# Altium PCB PDC_A.PcbDoc (part 1 of 2)
Units mm, origin at the board's own origin, x right, y up, seen from the top; angles counter-clockwise.
Board outline 139 x 130.14 mm, 2 copper layers (Top Layer, Bottom Layer); 172 components, 174 nets, 834 pads, 5 vias.
Unrouted connection lines stored in the file: 453.
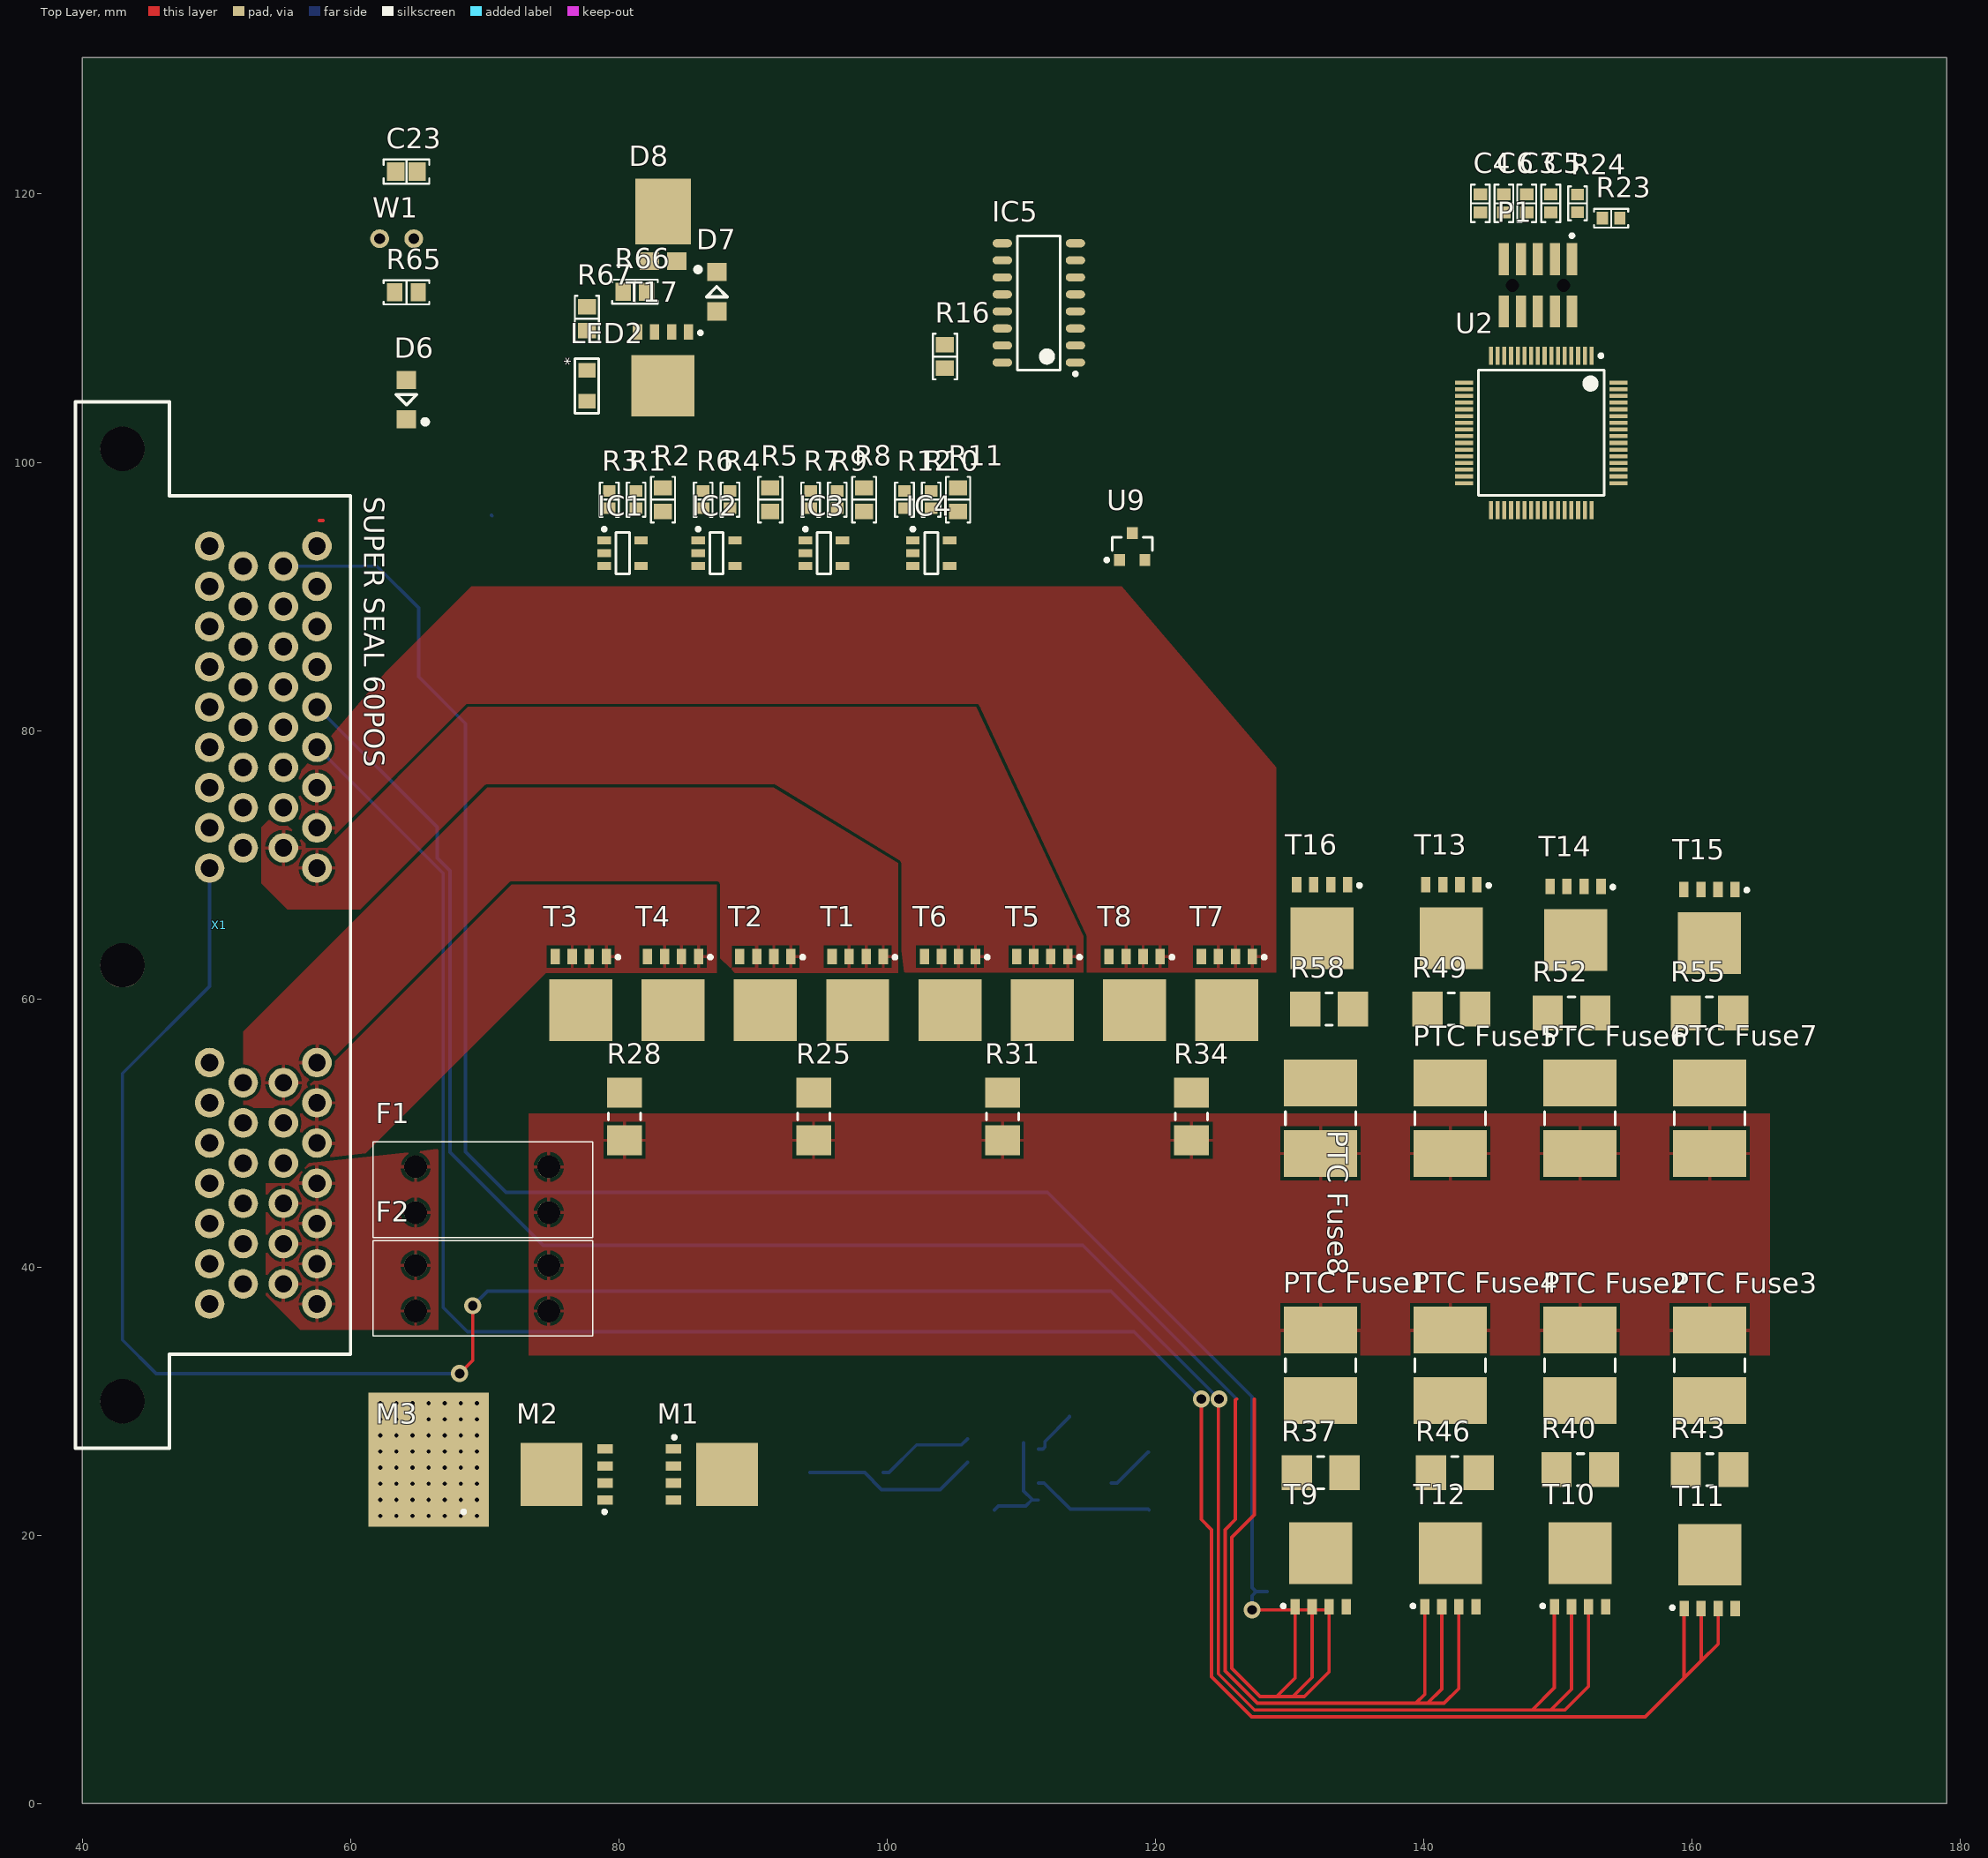
[diagram p0: Top Layer view]
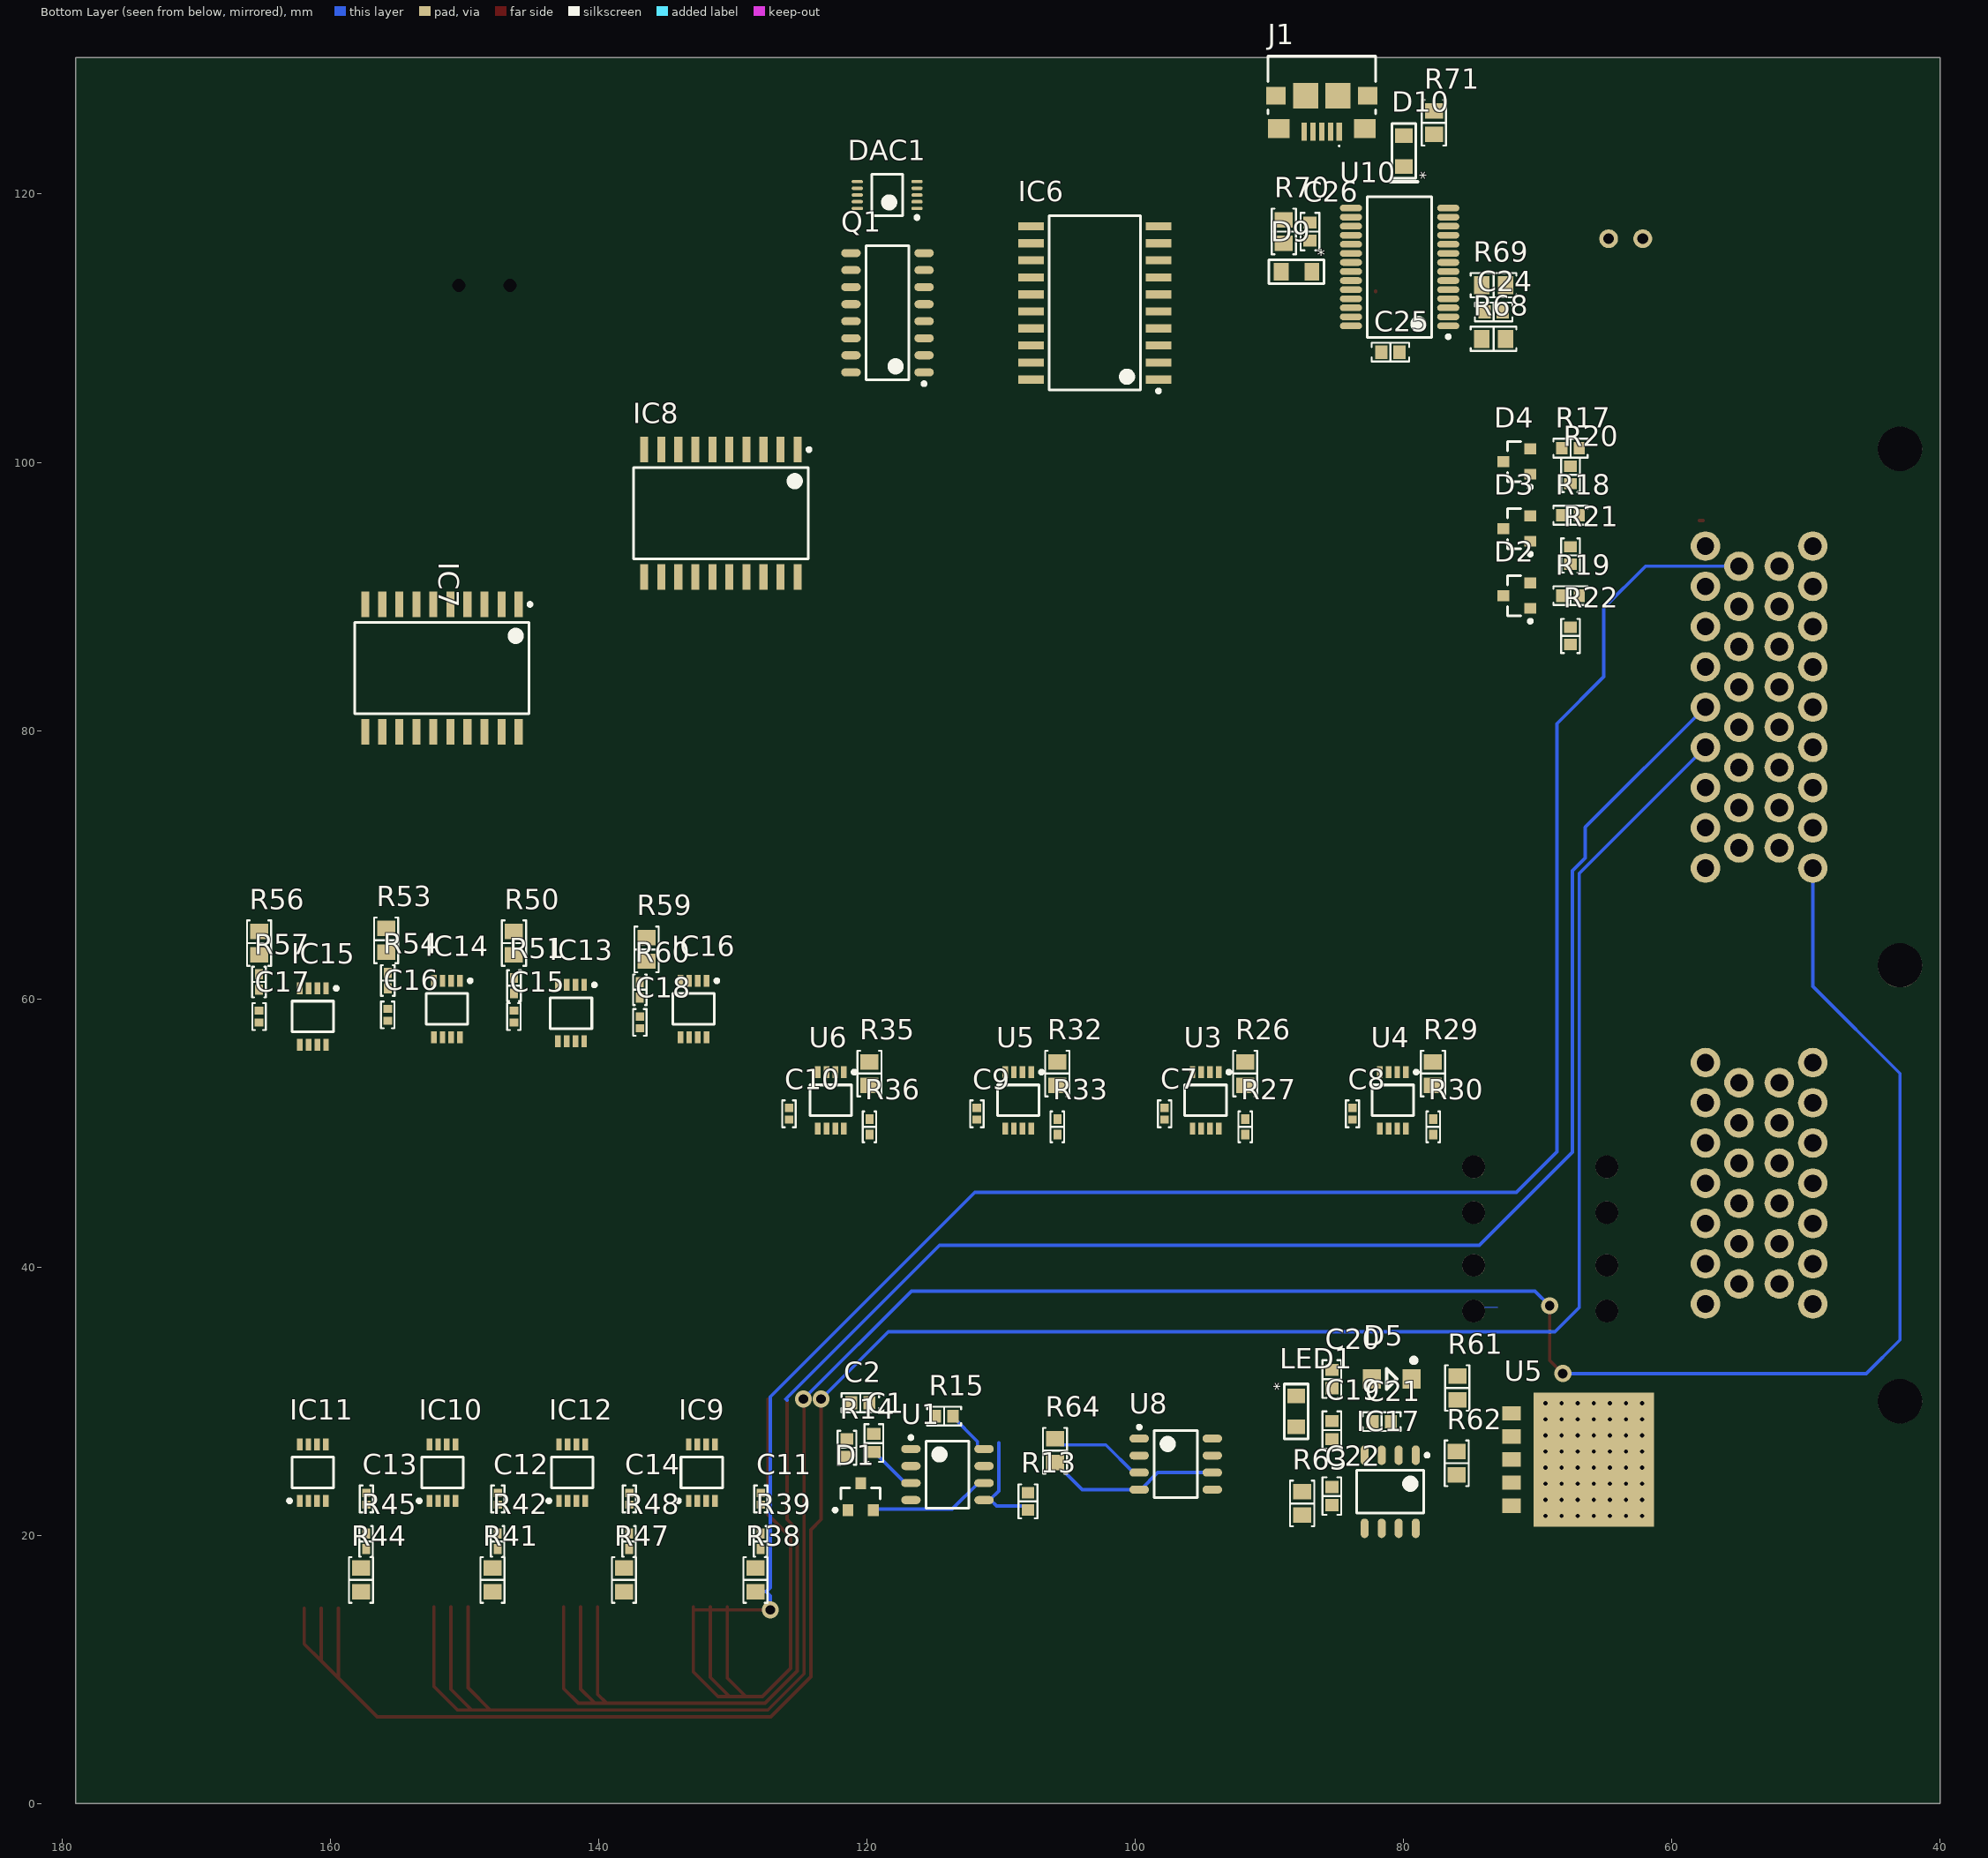
[diagram p1: Bottom Layer view, seen from below]

## Layer stack, top to bottom
Top Solder: solder mask 0.0102, Solder Resist, Dk 3.5
Top Layer: signal copper 0.0356
Dielectric 1: dielectric 0.32, FR-4, Dk 4.8
Bottom Layer: signal copper 0.0356
Bottom Solder: solder mask 0.0102, Solder Resist, Dk 3.5

## Board outline
40.001,0.024 179.001,0.024 179.001,130.168 40.001,130.168

## Design rules (kind name [scope] priority, off if disabled: settings)
Clearance [All] p1: gap=0.254 ignorepadtopadclearanceinfootprint=FALSE except(0: Arc-Hole Track-Hole SMDPad-Hole THPad-Hole Via-Hole Fill-Hole Poly-Hole Region-Hole Text-Hole)
PolygonConnect [All] p1: connectstyle=Relief reliefconductorwidth=0.254 reliefentries=4 polygonreliefangle="90 Angle" airgapwidth=0.254
RoomDefinition U_Input_Current_Limiting [InComponentClass('U_Input_Current_Limiting')] p1: confinementstyle=ConfineIn formatcopy=TRUE lockcomponents=FALSE outline 67.135,98.149 75.258,98.149 75.258,91.418 67.135,91.418
RoomDefinition U_Power_supply [InComponentClass('U_Power_supply')] p2: confinementstyle=ConfineIn formatcopy=TRUE lockcomponents=FALSE outline 0,0 50.8,0 50.8,25.4 0,25.4
RoomDefinition U_Reset_Pin [InComponentClass('U_Reset_Pin')] p3: confinementstyle=ConfineIn formatcopy=TRUE lockcomponents=FALSE outline 60.064,122.943 60.064,102.369 67.176,102.369 67.176,122.943
RoomDefinition U_CAN_Tranceiver [InComponentClass('U_CAN_Tranceiver')] p4: confinementstyle=ConfineIn formatcopy=TRUE lockcomponents=FALSE outline 120.328,16.572 108.186,16.572 108.186,25.208 120.328,25.208
RoomDefinition PDC [InComponentClass('PDC')] p5: confinementstyle=ConfineIn formatcopy=TRUE lockcomponents=FALSE outline 62.001,29.168 79.253,29.168 79.253,44.305 62.001,44.305
RoomDefinition U_Analog_HC_Overcurrent_MMPQ3904 [InComponentClass('U_Analog_HC_Overcurrent_MMPQ3904')] p6: confinementstyle=ConfineIn formatcopy=TRUE lockcomponents=FALSE outline 113.271,118.428 128.003,118.428 128.003,104.712 113.271,104.712
RoomDefinition U_PDC_Gate_Driver1 [InComponentClass('U_PDC_Gate_Driver1')] p7: confinementstyle=ConfineIn formatcopy=TRUE lockcomponents=FALSE outline 142.001,91.36 142.001,79.168 158.511,79.168 158.511,91.36
RoomDefinition U_PDC_Gate_Driver2 [InComponentClass('U_PDC_Gate_Driver2')] p8: confinementstyle=ConfineIn formatcopy=TRUE lockcomponents=FALSE outline 132.677,103.025 132.677,90.833 118.707,90.833 118.707,103.025
RoomDefinition U_USB [InComponentClass('U_USB')] p9: confinementstyle=ConfineIn formatcopy=TRUE lockcomponents=FALSE outline 70.981,120.692 89.086,120.692 89.086,106.722 70.981,106.722
RoomDefinition U_Rectifier_shutdown_LT1910 [InComponentClass('U_Rectifier_shutdown_LT1910')] p10: confinementstyle=ConfineIn formatcopy=TRUE lockcomponents=FALSE outline 107.214,17.352 93.498,17.352 93.498,25.988 107.214,25.988
RoomDefinition U_Gate_driver [InComponentClass('U_Gate_driver')] p11: confinementstyle=ConfineIn formatcopy=TRUE lockcomponents=FALSE outline 90.846,117.323 103.038,117.323 103.038,100.813 90.846,100.813
RoomDefinition U_Temperature_Sensing [InComponentClass('U_Temperature_Sensing')] p12: confinementstyle=ConfineIn formatcopy=TRUE lockcomponents=FALSE outline 122.555,92.168 122.555,96.486 115.824,96.486 115.824,92.168
RoomDefinition U_Superseal [InComponentClass('U_Superseal')] p13: confinementstyle=ConfineIn formatcopy=TRUE lockcomponents=FALSE outline 48.466,29.168 52.466,29.168 52.466,93.189 48.466,93.189
RoomDefinition U_RVP_OVP_HC [InComponentClass('U_RVP_OVP_HC')] p14: confinementstyle=ConfineIn formatcopy=TRUE lockcomponents=FALSE outline 75.301,107.753 91.626,107.753 91.626,116.643 75.301,116.643
RoomDefinition U_Rectifier_shutdown_Gate [InComponentClass('U_Rectifier_shutdown_Gate')] p15: confinementstyle=ConfineIn formatcopy=TRUE lockcomponents=FALSE outline 91.136,26.01 63.196,26.01 63.196,17.12 91.136,17.12
RoomDefinition U_PDC_Low_Current_Outputs8 [InComponentClass('U_PDC_Low_Current_Outputs8')] p16: confinementstyle=ConfineIn formatcopy=TRUE lockcomponents=FALSE outline 128.501,42.918 137.116,42.918 137.116,66.418 128.501,66.418
RoomDefinition U_PDC_Low_Current_Outputs7 [InComponentClass('U_PDC_Low_Current_Outputs7')] p17: confinementstyle=ConfineIn formatcopy=TRUE lockcomponents=FALSE outline 157.501,42.418 165.501,42.418 165.501,65.418 157.501,65.418
RoomDefinition U_PDC_Low_Current_Outputs6 [InComponentClass('U_PDC_Low_Current_Outputs6')] p18: confinementstyle=ConfineIn formatcopy=TRUE lockcomponents=FALSE outline 156.501,68.168 150.596,68.168 150.596,42.918 156.501,42.918
RoomDefinition U_PDC_Low_Current_Outputs5 [InComponentClass('U_PDC_Low_Current_Outputs5')] p19: confinementstyle=ConfineIn formatcopy=TRUE lockcomponents=FALSE outline 138.576,42.418 146.501,42.418 146.501,65.418 138.576,65.418
RoomDefinition U_PDC_Low_Current_Outputs4 [InComponentClass('U_PDC_Low_Current_Outputs4')] p20: confinementstyle=ConfineIn formatcopy=TRUE lockcomponents=FALSE outline 138.091,12.943 146.276,12.943 146.276,32.418 138.091,32.418
RoomDefinition U_PDC_Low_Current_Outputs3 [InComponentClass('U_PDC_Low_Current_Outputs3')] p21: confinementstyle=ConfineIn formatcopy=TRUE lockcomponents=FALSE outline 157.501,9.353 166.501,9.353 166.501,28.59 157.501,28.59
RoomDefinition U_PDC_Low_Current_Outputs2 [InComponentClass('U_PDC_Low_Current_Outputs2')] p22: confinementstyle=ConfineIn formatcopy=TRUE lockcomponents=FALSE outline 155.607,32.418 147.501,32.418 147.501,10.293 155.607,10.293
RoomDefinition U_PDC_Low_Current_Outputs1 [InComponentClass('U_PDC_Low_Current_Outputs1')] p23: confinementstyle=ConfineIn formatcopy=TRUE lockcomponents=FALSE outline 128.501,7.138 136.616,7.138 136.616,34.418 128.501,34.418
RoomDefinition U_PDC_high_Current_Outputs4 [InComponentClass('U_PDC_high_Current_Outputs4')] p24: confinementstyle=ConfineIn formatcopy=TRUE lockcomponents=FALSE outline 129.001,63.168 116.001,63.168 116.001,43.168 129.001,43.168
RoomDefinition U_PDC_high_Current_Outputs3 [InComponentClass('U_PDC_high_Current_Outputs3')] p25: confinementstyle=ConfineIn formatcopy=TRUE lockcomponents=FALSE outline 102.001,43.168 114.001,43.168 114.001,62.168 102.001,62.168
RoomDefinition U_PDC_high_Current_Outputs2 [InComponentClass('U_PDC_high_Current_Outputs2')] p26: confinementstyle=ConfineIn formatcopy=TRUE lockcomponents=FALSE outline 73.983,41.768 85.983,41.768 85.983,61.768 73.983,61.768
RoomDefinition U_PDC_high_Current_Outputs1 [InComponentClass('U_PDC_high_Current_Outputs1')] p27: confinementstyle=ConfineIn formatcopy=TRUE lockcomponents=FALSE outline 90.618,44.193 99.618,44.193 99.618,60.943 90.618,60.943
RoomDefinition U_MCU_MKE185F512VLH16 [InComponentClass('U_MCU_MKE185F512VLH16')] p28: confinementstyle=ConfineIn formatcopy=TRUE lockcomponents=FALSE outline 141.654,125.198 141.654,94.704 157.91,94.704 157.91,125.198
RoomDefinition U_E_stop [InComponentClass('U_E_stop')] p29: confinementstyle=ConfineIn formatcopy=TRUE lockcomponents=FALSE outline 114.978,118.939 101.516,118.939 101.516,105.223 114.978,105.223
RoomDefinition U_Analog_HC_Overcurrent_Redundancy4 [InComponentClass('U_Analog_HC_Overcurrent_Redundancy4')] p30: confinementstyle=ConfineIn formatcopy=TRUE lockcomponents=FALSE outline 118.035,97.4 124.512,97.4 124.512,101.718 118.035,101.718
RoomDefinition U_Analog_HC_Overcurrent_Redundancy3 [InComponentClass('U_Analog_HC_Overcurrent_Redundancy3')] p31: confinementstyle=ConfineIn formatcopy=TRUE lockcomponents=FALSE outline 111.908,97.518 118.385,97.518 118.385,101.836 111.908,101.836
RoomDefinition U_Analog_HC_Overcurrent_Redundancy2 [InComponentClass('U_Analog_HC_Overcurrent_Redundancy2')] p32: confinementstyle=ConfineIn formatcopy=TRUE lockcomponents=FALSE outline 102.452,95.218 112.9,95.218 112.9,102.076 102.452,102.076
RoomDefinition U_Analog_HC_Overcurrent_Redundancy1 [InComponentClass('U_Analog_HC_Overcurrent_Redundancy1')] p33: confinementstyle=ConfineIn formatcopy=TRUE lockcomponents=FALSE outline 95.032,94.85 101.001,94.85 101.001,99.168 95.032,99.168
RoutingVias [All] p1: holewidth=0.711 width=1.27 viastyle="Through Hole" minholewidth=0.711 minwidth=1.27 maxholewidth=0.711 maxwidth=1.27
SolderMaskExpansion [All] p1: expansion=0.102
Width [All] p1: maxlimit=0.26 minlimit=0.25 preferedwidth=0.25
30 further rules are at their usual default settings.

## Classes and differential pairs
channel class PDC_Low_Current_Outputs: U_PDC_Low_Current_Outputs1 U_PDC_Low_Current_Outputs2 U_PDC_Low_Current_Outputs3 U_PDC_Low_Current_Outputs4 U_PDC_Low_Current_Outputs5 U_PDC_Low_Current_Outputs6 U_PDC_Low_Current_Outputs7 U_PDC_Low_Current_Outputs8
channel class PDC_high_Current_Outputs: U_PDC_high_Current_Outputs1 U_PDC_high_Current_Outputs2 U_PDC_high_Current_Outputs3 U_PDC_high_Current_Outputs4
channel class PDC_Gate_Driver: U_PDC_Gate_Driver1 U_PDC_Gate_Driver2
channel class Analog_HC_Overcurrent_Redundancy: U_Analog_HC_Overcurrent_Redundancy1 U_Analog_HC_Overcurrent_Redundancy2 U_Analog_HC_Overcurrent_Redundancy3 U_Analog_HC_Overcurrent_Redundancy4
component class U_USB: C24 C25 C26 D9 D10 J1 R68 R69 R70 R71 U10
component class U_Temperature_Sensing: U9
component class U_Superseal: X1
component class U_RVP_OVP_HC: D7 D8 LED2 R66 R67 T17
component class U_Reset_Pin: C23 D6 R65 W1
component class U_Rectifier_shutdown_LT1910: R64 U8
component class U_Rectifier_shutdown_Gate: M1 M2 M3
component class U_Power_supply: C19 C20 C21 C22 D5 IC17 LED1 R61 R62 R63 U5
component class U_PDC_Low_Current_Outputs8: C18 IC16 "PTC Fuse8" R58 R59 R60 T16
component class U_PDC_Low_Current_Outputs7: C17 IC15 "PTC Fuse7" R55 R56 R57 T15
component class U_PDC_Low_Current_Outputs6: C16 IC14 "PTC Fuse6" R52 R53 R54 T14
component class U_PDC_Low_Current_Outputs5: C15 IC13 "PTC Fuse5" R49 R50 R51 T13
component class U_PDC_Low_Current_Outputs4: C14 IC12 "PTC Fuse4" R46 R47 R48 T12
component class U_PDC_Low_Current_Outputs3: C13 IC11 "PTC Fuse3" R43 R44 R45 T11
component class U_PDC_Low_Current_Outputs2: C12 IC10 "PTC Fuse2" R40 R41 R42 T10
component class U_PDC_Low_Current_Outputs1: C11 IC9 "PTC Fuse1" R37 R38 R39 T9
component class U_PDC_high_Current_Outputs4: C10 R34 R35 R36 T7 T8 U6
component class U_PDC_high_Current_Outputs3: C9 R31 R32 R33 T5 T6 U5
component class U_PDC_high_Current_Outputs2: C8 R28 R29 R30 T3 T4 U4
component class U_PDC_high_Current_Outputs1: C7 R25 R26 R27 T1 T2 U3
component class U_PDC_Gate_Driver2: IC8
component class U_PDC_Gate_Driver1: IC7
component class U_MCU_MKE185F512VLH16: C3 C4 C5 C6 P1 R23 R24 U2
component class U_Input_Current_Limiting: D2 D3 D4 R17 R18 R19 R20 R21 R22
component class U_Gate_driver: IC6
component class U_E_stop: IC5 R16
component class U_CAN_Tranceiver: C1 C2 D1 R13 R14 R15 U1
component class U_Analog_HC_Overcurrent_Redundancy4: IC4 R10 R11 R12
component class U_Analog_HC_Overcurrent_Redundancy3: IC3 R7 R8 R9
component class U_Analog_HC_Overcurrent_Redundancy2: IC2 R4 R5 R6
component class U_Analog_HC_Overcurrent_Redundancy1: IC1 R1 R2 R3
component class U_Analog_HC_Overcurrent_MMPQ3904: DAC1 Q1
component class PDC: F1 F2

## Components (designator, comment, footprint, x,y, rotation, side; value= is the part's Value field where it differs from the comment)
C1 "Capacitor MLCC 0.10uf 50V CAP 0603/1608" "CAP 0603/1608" 119.492,26.886 r270 bottom value=0.10uf (schematic designator C15)
C2 "Capacitor MLCC 4700pf 50V CAP 0603/1608" "CAP 0603/1608" 120.492,29.886 r0 bottom value=4700pf (schematic designator C16)
C3 "Capacitor MLCC 0.10uf 16V CAP 0603/1608" "CAP 0603/1608" 147.679,119.304 r270 top value=0.10uf (schematic designator C17)
C4 "Capacitor MLCC 0.10uf 25V CAP 0603/1608" "CAP 0603/1608" 144.22,119.304 r270 top value=0.10uf (schematic designator C18)
C5 "Capacitor MLCC 100pf 25V CAP 0603/1608" "CAP 0603/1608" 149.47,119.304 r270 top value=100pf (schematic designator C19)
C6 "Capacitor MLCC 0.10uf 25V CAP 0603/1608" "CAP 0603/1608" 145.97,119.304 r270 top value=0.10uf (schematic designator C20)
C7 "Capacitor MLCC 220pf 16V CAP 0402/1005" "CAP 0402/1005" 97.816,51.431 r90 bottom value=220pf (schematic designator C1)
C8 "Capacitor MLCC 220pf 16V CAP 0402/1005" "CAP 0402/1005" 83.816,51.431 r270 bottom value=220pf (schematic designator C1)
C9 "Capacitor MLCC 220pf 16V CAP 0402/1005" "CAP 0402/1005" 111.816,51.431 r90 bottom value=220pf (schematic designator C1)
C10 "Capacitor MLCC 220pf 16V CAP 0402/1005" "CAP 0402/1005" 125.816,51.431 r90 bottom value=220pf (schematic designator C1)
C11 "Capacitor MLCC 220pf 16V CAP 0402/1005" "CAP 0402/1005" 127.916,22.721 r90 bottom value=220pf (schematic designator C2)
C12 "Capacitor MLCC 220pf 16V CAP 0402/1005" "CAP 0402/1005" 147.516,22.721 r270 bottom value=220pf (schematic designator C2)
C13 "Capacitor MLCC 220pf 16V CAP 0402/1005" "CAP 0402/1005" 157.316,22.721 r270 bottom value=220pf (schematic designator C2)
C14 "Capacitor MLCC 220pf 16V CAP 0402/1005" "CAP 0402/1005" 137.716,22.721 r270 bottom value=220pf (schematic designator C2)
C15 "Capacitor MLCC 220pf 16V CAP 0402/1005" "CAP 0402/1005" 146.316,58.681 r270 bottom value=220pf (schematic designator C2)
C16 "Capacitor MLCC 220pf 16V CAP 0402/1005" "CAP 0402/1005" 155.726,58.806 r270 bottom value=220pf (schematic designator C2)
C17 "Capacitor MLCC 220pf 16V CAP 0402/1005" "CAP 0402/1005" 165.316,58.681 r90 bottom value=220pf (schematic designator C2)
C18 "Capacitor MLCC 220pf 16V CAP 0402/1005" "CAP 0402/1005" 136.931,58.241 r270 bottom value=220pf (schematic designator C2)
C19 "Capacitor MLCC 10uf 16V CAP 0603/1608" "CAP 0603/1608" 85.352,27.843 r270 bottom value=10uf (schematic designator C3)
C20 "Capacitor MLCC 10uf 16V CAP 0603/1608" "CAP 0603/1608" 85.352,31.653 r90 bottom value=10uf (schematic designator C4)
C21 "Capacitor MLCC 2.2uf 16V CAP 0603/1608" "CAP 0603/1608" 81.637,28.478 r180 bottom value=2.2uf (schematic designator C5)
C22 "Capacitor MLCC 2.2uf 16V CAP 0603/1608" "CAP 0603/1608" 85.352,22.928 r270 bottom value=2.2uf (schematic designator C6)
C23 "Capacitor MLCC 4700pf 25V CAP 0805/2012" "CAP 0805/2012" 64.176,121.669 r0 top value=4700pf (schematic designator C13)
C24 "Capacitor MLCC 0.10uf 25V CAP 0603/1608" "CAP 0603/1608" 73.292,111.207 r180 bottom value=0.10uf (schematic designator C21)
C25 "Capacitor MLCC 0.10uf 25V CAP 0603/1608" "CAP 0603/1608" 80.981,108.207 r180 bottom value=0.10uf (schematic designator C22)
C26 "Capacitor MLCC 0.10uf 25V CAP 0603/1608" "CAP 0603/1608" 86.981,117.207 r90 bottom value=0.10uf (schematic designator C23)
D1 "NUP1105LT1G" "SOT-23 (TO-236)" 120.476,22.886 r90 bottom value=TVS_24V (schematic designator D3)
D2 "AZ23C4V7-7-F Dual Zenner Diodes" SOT23-3 71.558,90.055 r0 bottom value=4.7V (schematic designator D3)
D3 "AZ23C4V7-7-F Dual Zenner Diodes" SOT23-3 71.558,95.055 r0 bottom value=4.7V (schematic designator D4)
D4 "AZ23C4V7-7-F Dual Zenner Diodes" SOT23-3 71.558,100.055 r0 bottom value=4.7V (schematic designator D5)
D5 "DIODE" SOD123F 80.887,31.653 r180 bottom value=1A (schematic designator D1)
D6 "DIODE" SOD123F 64.176,104.669 r270 top
D7 "DDZ9701-7" SOD123F 87.301,112.723 r90 top value=14Vz
D8 "DIODE_2A1K" TO-277 83.301,117.794 r90 top value="20 A"
D9 "" 0805_LED 87.981,114.207 r180 bottom value=Green (schematic designator D4)
D10 "" 0805_LED 79.981,123.207 r270 bottom value=Red (schematic designator D5)
DAC1 "LED" "MSOP10 (RM-10)" 118.496,119.928 r0 bottom value=10bit
F1 "Fuse" 3568-MiniFuseHolder 69.816,45.771 r180 top
F2 "Fuse" 3568-MiniFuseHolder 69.816,38.431 r180 top
IC1 "Op-Amp LT1716" SOT23-5 80.291,93.218 r0 top
IC2 "Op-Amp LT1716" SOT23-5 87.291,93.218 r0 top (schematic designator IC1)
IC3 "Op-Amp LT1716" SOT23-5 95.291,93.218 r0 top (schematic designator IC1)
IC4 "Op-Amp LT1716" SOT23-5 103.291,93.218 r0 top (schematic designator IC1)
IC5 "MMPQ3906 PNP General Purpose Amp" SOIC-16-NB 111.314,111.883 r180 top (schematic designator IC2)
IC6 "LT1161ISWPBF MOSFET Driver" SO-20 103.021,111.883 r0 bottom (schematic designator IC3)
IC7 "LT1161ISWPBF MOSFET Driver" SO-20 151.686,84.66 r270 bottom (schematic designator IC4)
IC8 "LT1161ISWPBF MOSFET Driver" SO-20 130.889,96.198 r270 bottom (schematic designator IC4)
IC9 "LT6100HMS8PBF Current Sense Amp" MSOP-8 132.316,24.681 r90 bottom (schematic designator IC5)
IC10 "LT6100HMS8PBF Current Sense Amp" MSOP-8 151.649,24.681 r90 bottom (schematic designator IC5)
IC11 "LT6100HMS8PBF Current Sense Amp" MSOP-8 161.316,24.681 r90 bottom (schematic designator IC5)
IC12 "LT6100HMS8PBF Current Sense Amp" MSOP-8 141.983,24.681 r90 bottom (schematic designator IC5)
IC13 "LT6100HMS8PBF Current Sense Amp" MSOP-8 142.059,58.931 r270 bottom (schematic designator IC5)
IC14 "LT6100HMS8PBF Current Sense Amp" MSOP-8 151.316,59.241 r270 bottom (schematic designator IC5)
IC15 "LT6100HMS8PBF Current Sense Amp" MSOP-8 161.301,58.681 r270 bottom (schematic designator IC5)
IC16 "LT6100HMS8PBF Current Sense Amp" MSOP-8 132.931,59.241 r270 bottom (schematic designator IC5)
IC17 "MAX6350CSA+ 5V" SOIC-8 81.002,23.253 r270 bottom value=5V (schematic designator IC6)
J1 "1981568-1" TECO-1981568-5_V 86.101,124.662 r0 bottom value=CONN
LED1 "LED" 0805_LED 88.002,29.253 r90 bottom value=Green
LED2 "LED" 0805_LED 77.626,105.707 r90 top value=Green
M1 "PSMN2R2-25YLC 25V Logic Level MOSFET" LFPAK-SO8 86.786,24.536 r0 top value=N_Channel
M2 "PSMN2R2-25YLC 25V Logic Level MOSFET" LFPAK-SO8 76.286,24.536 r180 top value=N_Channel
M3 "PSMN2R2-25YLC 25V Logic Level MOSFET" LFPAK-SO8 65.786,24.536 r180 top value=N_Channel
P1 "5103309-1" HDR2X5_SMT 148.511,113.198 r180 top value=CONN
"PTC Fuse1" "PTC Fuse" "PTC Fuse 2920/07351" 132.316,32.681 r90 top
"PTC Fuse2" "PTC Fuse" "PTC Fuse 2920/07351" 151.649,32.681 r90 top (schematic designator "PTC Fuse1")
"PTC Fuse3" "PTC Fuse" "PTC Fuse 2920/07351" 161.316,32.681 r90 top (schematic designator "PTC Fuse1")
"PTC Fuse4" "PTC Fuse" "PTC Fuse 2920/07351" 141.983,32.681 r90 top (schematic designator "PTC Fuse1")
"PTC Fuse5" "PTC Fuse" "PTC Fuse 2920/07351" 141.983,51.096 r270 top (schematic designator "PTC Fuse1")
"PTC Fuse6" "PTC Fuse" "PTC Fuse 2920/07351" 151.649,51.096 r270 top (schematic designator "PTC Fuse1")
"PTC Fuse7" "PTC Fuse" "PTC Fuse 2920/07351" 161.316,51.096 r270 top (schematic designator "PTC Fuse1")
"PTC Fuse8" "PTC Fuse" "PTC Fuse 2920/07351" 132.316,51.096 r270 top (schematic designator "PTC Fuse1")
Q1 "MMPQ3904" SOIC-16-NB 118.471,111.153 r0 bottom
R1 "Resistor 10k 0603 1/10W 1%" "RES 0603/1608" 81.291,97.218 r90 top value=10k
R2 "Resistor 10k 0805 1/10W 1%" "RES 0805/2012" 83.291,97.218 r270 top value=10k
R3 "Resistor 3.0k 0603 1/10W 1%" "RES 0603/1608" 79.291,97.218 r270 top value=3.0k
R4 "Resistor 10k 0603 1/10W 1%" "RES 0603/1608" 88.291,97.218 r270 top value=10k (schematic designator R1)
R5 "Resistor 10k 0805 1/10W 1%" "RES 0805/2012" 91.291,97.218 r90 top value=10k (schematic designator R2)
R6 "Resistor 3.0k 0603 1/10W 1%" "RES 0603/1608" 86.291,97.218 r270 top value=3.0k (schematic designator R3)
R7 "Resistor 10k 0603 1/10W 1%" "RES 0603/1608" 94.291,97.218 r270 top value=10k (schematic designator R1)
R8 "Resistor 10k 0805 1/10W 1%" "RES 0805/2012" 98.291,97.218 r270 top value=10k (schematic designator R2)
R9 "Resistor 3.0k 0603 1/10W 1%" "RES 0603/1608" 96.291,97.218 r90 top value=3.0k (schematic designator R3)
R10 "Resistor 10k 0603 1/10W 1%" "RES 0603/1608" 103.291,97.218 r90 top value=10k (schematic designator R1)
R11 "Resistor 10k 0805 1/10W 1%" "RES 0805/2012" 105.291,97.218 r270 top value=10k (schematic designator R2)
R12 "Resistor 3.0k 0603 1/10W 1%" "RES 0603/1608" 101.291,97.218 r270 top value=3.0k (schematic designator R3)
R13 "Resistor 62 0603 1/10W 5%" "RES 0603/1608" 108.001,22.536 r270 bottom value=62 (schematic designator R23)
R14 "Resistor 62 0603 1/10W 5%" "RES 0603/1608" 121.492,26.536 r270 bottom value=62 (schematic designator R24)
R15 "Resistor 100 0603 1/10W 10%" "RES 0603/1608" 114.251,28.886 r180 bottom value=100 (schematic designator R25)
R16 "Resistor 10k 0805 1/10W 1%" "RES 0805/2012" 104.314,107.883 r270 top value=10k (schematic designator R4)
R17 "Resistor 2.2k 0603 1/10W 1%" "RES 0603/1608" 67.558,101.055 r180 bottom value=2.2k (schematic designator R18)
R18 "Resistor 2.2k 0603 1/10W 1%" "RES 0603/1608" 67.558,96.055 r180 bottom value=2.2k (schematic designator R19)
R19 "Resistor 2.2k 0603 1/10W 1%" "RES 0603/1608" 67.558,90.055 r180 bottom value=2.2k (schematic designator R20)
R20 "Resistor 2.2k 0603 1/10W 1%" "RES 0603/1608" 67.558,99.055 r90 bottom value=2.2k (schematic designator R21)
R21 "Resistor 2.2k 0603 1/10W 1%" "RES 0603/1608" 67.558,93.055 r90 bottom value=2.2k (schematic designator R22)
R22 "Resistor 2.2k 0603 1/10W 1%" "RES 0603/1608" 67.558,87.055 r90 bottom value=2.2k (schematic designator R23)
R23 "Resistor 10k 0603 1/10W 1%" "RES 0603/1608" 153.97,118.198 r180 top value=10k (schematic designator R26)
R24 "Resistor 10k 0603 1/10W 5%" "RES 0603/1608" 151.47,119.304 r270 top value=10k (schematic designator R27)
R25 "Resistor .002 2010 1.5W 1%" "RES 2010/5025" 94.52,51.231 r270 top value=.002 (schematic designator R5)
R26 "Resistor 27k 0805 1/10W 10%" "RES 0805/2012" 91.816,54.431 r90 bottom value=27k (schematic designator R6)
R27 "Resistor 10k 0402 1/10W 1%" "RES 0402/1005" 91.804,50.456 r270 bottom value=10k (schematic designator R7)
R28 "Resistor .002 2010 1.5W 1%" "RES 2010/5025" 80.433,51.231 r270 top value=.002 (schematic designator R5)
R29 "Resistor 27k 0805 1/10W 10%" "RES 0805/2012" 77.816,54.431 r90 bottom value=27k (schematic designator R6)
R30 "Resistor 10k 0402 1/10W 1%" "RES 0402/1005" 77.798,50.456 r90 bottom value=10k (schematic designator R7)
R31 "Resistor .002 2010 1.5W 1%" "RES 2010/5025" 108.607,51.231 r270 top value=.002 (schematic designator R5)
R32 "Resistor 27k 0805 1/10W 10%" "RES 0805/2012" 105.816,54.431 r90 bottom value=27k (schematic designator R6)
R33 "Resistor 10k 0402 1/10W 1%" "RES 0402/1005" 105.81,50.456 r270 bottom value=10k (schematic designator R7)
R34 "Resistor .002 2010 1.5W 1%" "RES 2010/5025" 122.694,51.231 r270 top value=.002 (schematic designator R5)
R35 "Resistor 27k 0805 1/10W 10%" "RES 0805/2012" 119.816,54.431 r90 bottom value=27k (schematic designator R6)
R36 "Resistor 10k 0402 1/10W 1%" "RES 0402/1005" 119.816,50.456 r90 bottom value=10k (schematic designator R7)
R37 "Resistor .02 2010 1W 1%" "RES 2010/5025" 132.316,24.681 r0 top value=.02 (schematic designator R8)
R38 "Resistor 27k 0805 1/10W 10%" "RES 0805/2012" 128.316,16.681 r270 bottom value=27k (schematic designator R9)
R39 "Resistor 10k 0402 1/10W 1%" "RES 0402/1005" 127.941,19.551 r270 bottom value=10k (schematic designator R10)
R40 "Resistor .02 2010 1W 1%" "RES 2010/5025" 151.681,24.889 r180 top value=.02 (schematic designator R8)
R41 "Resistor 27k 0805 1/10W 10%" "RES 0805/2012" 147.916,16.681 r270 bottom value=27k (schematic designator R9)
R42 "Resistor 10k 0402 1/10W 1%" "RES 0402/1005" 147.541,19.551 r270 bottom value=10k (schematic designator R10)
R43 "Resistor .02 2010 1W 1%" "RES 2010/5025" 161.316,24.889 r180 top value=.02 (schematic designator R8)
R44 "Resistor 27k 0805 1/10W 10%" "RES 0805/2012" 157.716,16.681 r270 bottom value=27k (schematic designator R9)
R45 "Resistor 10k 0402 1/10W 1%" "RES 0402/1005" 157.341,19.551 r270 bottom value=10k (schematic designator R10)
R46 "Resistor .02 2010 1W 1%" "RES 2010/5025" 142.316,24.681 r0 top value=.02 (schematic designator R8)
R47 "Resistor 27k 0805 1/10W 10%" "RES 0805/2012" 138.116,16.681 r270 bottom value=27k (schematic designator R9)
R48 "Resistor 10k 0402 1/10W 1%" "RES 0402/1005" 137.741,19.551 r270 bottom value=10k (schematic designator R10)
R49 "Resistor .02 2010 1W 1%" "RES 2010/5025" 142.059,59.241 r0 top value=.02 (schematic designator R8)
R50 "Resistor 27k 0805 1/10W 10%" "RES 0805/2012" 146.316,64.156 r90 bottom value=27k (schematic designator R9)
R51 "Resistor 10k 0402 1/10W 1%" "RES 0402/1005" 146.316,60.981 r90 bottom value=10k (schematic designator R10)
R52 "Resistor .02 2010 1W 1%" "RES 2010/5025" 151.014,58.931 r0 top value=.02 (schematic designator R8)
R53 "Resistor 27k 0805 1/10W 10%" "RES 0805/2012" 155.841,64.366 r90 bottom value=27k (schematic designator R9)
R54 "Resistor 10k 0402 1/10W 1%" "RES 0402/1005" 155.726,61.366 r90 bottom value=10k (schematic designator R10)
R55 "Resistor .02 2010 1W 1%" "RES 2010/5025" 161.301,58.931 r0 top value=.02 (schematic designator R8)
R56 "Resistor 27k 0805 1/10W 10%" "RES 0805/2012" 165.316,64.156 r270 bottom value=27k (schematic designator R9)
R57 "Resistor 10k 0402 1/10W 1%" "RES 0402/1005" 165.316,61.256 r90 bottom value=10k (schematic designator R10)
R58 "Resistor .02 2010 1W 1%" "RES 2010/5025" 132.951,59.241 r0 top value=.02 (schematic designator R8)
R59 "Resistor 27k 0805 1/10W 10%" "RES 0805/2012" 136.431,63.681 r270 bottom value=27k (schematic designator R9)
R60 "Resistor 10k 0402 1/10W 1%" "RES 0402/1005" 136.931,60.681 r90 bottom value=10k (schematic designator R10)
R61 "Resistor 39k 0805 1/10W 10%" "RES 0805/2012" 76.002,30.988 r90 bottom value=39k (schematic designator R11)
R62 "Resistor 10k 0805 1/4W 10%" "RES 0805/2012" 76.042,25.378 r90 bottom value=10k (schematic designator R12)
R63 "Resistor 1.0k 0805 1/10W 10%" "RES 0805/2012" 87.562,22.378 r90 bottom value=1.0k (schematic designator R13)
R64 "Resistance" "RES 0805/2012" 105.986,26.316 r90 bottom value=14.7K (schematic designator R14)
R65 "Resistor 100k 0805 1/10W 1%" "RES 0805/2012" 64.176,112.669 r0 top value=100k (schematic designator R26)
R66 "Resistor 47k 0805 1/10W 1%" "RES 0805/2012" 81.206,112.723 r180 top value=47k (schematic designator R27)
R67 "Resistor 470 0805 1/10W 1%" "RES 0805/2012" 77.626,110.707 r270 top value=470 (schematic designator R28)
R68 "Resistor 1.0k 0805 1/4W 1%" "RES 0805/2012" 73.292,109.207 r180 bottom value=1.0k (schematic designator R28)
R69 "Resistor 1.0k 0805 1/4W 1%" "RES 0805/2012" 73.292,113.207 r180 bottom value=1.0k (schematic designator R29)
R70 "Resistor 1.0k 0805 1/4W 1%" "RES 0805/2012" 88.931,117.207 r270 bottom value=1.0k (schematic designator R30)
R71 "Resistor 1.0k 0805 1/4W 1%" "RES 0805/2012" 77.742,125.313 r90 bottom value=1.0k (schematic designator R31)
T1 "PSMN2R2-25YLC 25V Logic Level MOSFET" LFPAK-SO8 97.806,60.456 r270 top value=N_Channel
T2 "PSMN2R2-25YLC 25V Logic Level MOSFET" LFPAK-SO8 90.925,60.456 r270 top value=N_Channel
T3 "PSMN2R2-25YLC 25V Logic Level MOSFET" LFPAK-SO8 77.163,60.456 r270 top value=N_Channel (schematic designator T1)
T4 "PSMN2R2-25YLC 25V Logic Level MOSFET" LFPAK-SO8 84.044,60.456 r270 top value=N_Channel (schematic designator T2)
T5 "PSMN2R2-25YLC 25V Logic Level MOSFET" LFPAK-SO8 111.567,60.456 r270 top value=N_Channel (schematic designator T1)
T6 "PSMN2R2-25YLC 25V Logic Level MOSFET" LFPAK-SO8 104.686,60.456 r270 top value=N_Channel (schematic designator T2)
T7 "PSMN2R2-25YLC 25V Logic Level MOSFET" LFPAK-SO8 125.329,60.456 r270 top value=N_Channel (schematic designator T1)
T8 "PSMN2R2-25YLC 25V Logic Level MOSFET" LFPAK-SO8 118.448,60.456 r270 top value=N_Channel (schematic designator T2)
T9 "PSMN2R2-25YLC 25V Logic Level MOSFET" LFPAK-SO8 132.316,17.381 r90 top value=N_Channel (schematic designator T3)
T10 "PSMN2R2-25YLC 25V Logic Level MOSFET" LFPAK-SO8 151.649,17.381 r90 top value=N_Channel (schematic designator T3)
T11 "PSMN2R2-25YLC 25V Logic Level MOSFET" LFPAK-SO8 161.316,17.256 r90 top value=N_Channel (schematic designator T3)
T12 "PSMN2R2-25YLC 25V Logic Level MOSFET" LFPAK-SO8 141.983,17.381 r90 top value=N_Channel (schematic designator T3)
T13 "PSMN2R2-25YLC 25V Logic Level MOSFET" LFPAK-SO8 142.059,65.806 r270 top value=N_Channel (schematic designator T3)
T14 "PSMN2R2-25YLC 25V Logic Level MOSFET" LFPAK-SO8 151.316,65.681 r270 top value=N_Channel (schematic designator T3)
T15 "PSMN2R2-25YLC 25V Logic Level MOSFET" LFPAK-SO8 161.301,65.456 r270 top value=N_Channel (schematic designator T3)
T16 "PSMN2R2-25YLC 25V Logic Level MOSFET" LFPAK-SO8 132.431,65.806 r270 top value=N_Channel (schematic designator T3)
T17 "PSMN2R2-25YLC 25V Logic Level MOSFET" LFPAK-SO8 83.301,107.007 r270 top value=N_Channel (schematic designator T4)
U1 "MCP2561 CAN Transceiver" SOIC-8 114.001,24.536 r180 bottom value=CAN/UART (schematic designator U2)
U2 "" TQFP64 148.761,102.198 r270 top (schematic designator U3)
U3 "LT6100HMS8PBF Current Sense Amp" MSOP-8 94.763,52.431 r270 bottom (schematic designator U1)
U4 "LT6100HMS8PBF Current Sense Amp" MSOP-8 80.798,52.431 r270 bottom (schematic designator U1)
U5 "BA50DD0WHFP-TR Linear Voltage Regulators 5" HRP5 65.825,25.653 r270 bottom value=5V
U5 "LT6100HMS8PBF Current Sense Amp" MSOP-8 108.729,52.431 r270 bottom (schematic designator U1)
U6 "LT6100HMS8PBF Current Sense Amp" MSOP-8 122.694,52.431 r270 bottom (schematic designator U1)
U8 "LT1910" SOIC-8 96.986,25.316 r180 bottom (schematic designator U3)
U9 "MCP970x" SOT23-3 118.274,93.721 r90 top (schematic designator U6)
U10 "FT232RL" SSOP-28 80.301,114.562 r0 bottom (schematic designator U4)
W1 "Jumper" XG8T-0231 62.176,116.669 r0 top
X1 "3-6437285-2" "SUPERSEAL 60POS 90Deg" 43.001,101 r270 top value=CONN

## Footprints (in the part's own frame and the unit in brackets; to place one, negate y for a bottom-side part, rotate by r counter-clockwise, add the part's x,y. Pads: shape width x height; smd on the part's side, far side on the other; paste and mask are expansions set on the pad)
0805_LED [mm]
  rect 1.1x1.3 smd: 1(-1.15,0) 2(1.15,0)
  silkscreen extent -2.06,-0.89 2.03,0.89, body extent -1.05,-0.67 1.05,0.68, height 0.9
3568-MiniFuseHolder [mm] "3568 Mini Fuse Holder"
  round 1.7 hole 1.7: 1(-4.96,-1.7) 1(-4.96,1.7) 2(4.96,-1.7) 2(4.96,1.7)
  silkscreen extent -8.25,-3.56 8.13,3.56, body extent -8,-4.19 8,3.38, height 16.17
"CAP 0402/1005" [mm] "Chip Capacitor, 2-Leads, Body 1.02x0.51mm, IPC Medium Density"
  rect 0.6x0.64 smd: 1(-0.44,0) 2(0.44,0)
  silkscreen extent -1,-0.5 1,0.5, body extent -0.5,-0.26 0.5,0.26, height 0.52
"CAP 0603/1608" [mm] "Chip Capacitor, 2-Leads, Body 1.60x0.80mm, IPC Medium Density"
  rect 0.9x1 smd: 1(-0.675,0) 2(0.675,0)
  silkscreen extent -1.4,-0.7 1.4,0.7, body extent -0.8,-0.41 0.8,0.41, height 0.82
"CAP 0805/2012" [mm] "Chip Capacitor, 2-Leads, Body 2.00x1.20mm, IPC Medium Density"
  rect 1.3x1.4 smd: 1(-0.8,0) 2(0.8,0)
  silkscreen extent -1.7,-0.9 1.7,0.9, body extent -1,-0.64 1,0.64, height 1.26
HDR2X5_SMT [mm] "Header, 10-Leads, Body 3.43x6.35mm, Pitch 1.27mm"
  rect 0.76x2.4 smd: 1(-2.54,-1.95) 2(-2.54,1.95) 3(-1.27,-1.95) 4(-1.27,1.95) 5(0,-1.95) 6(0,1.95) 7(1.27,-1.95) 8(1.27,1.95) 9(2.54,-1.95) 10(2.54,1.95)
  round 0 hole 1 unplated: MH1(-1.905,0) MH2(1.905,0)
  silkscreen extent -2.67,-3.82 -2.42,-3.58, body extent -3.18,-1.72 3.18,1.72, height 4.55
HRP5 [mm]
  rect 1.07x1.37 smd: 1(-3.44,-6.125) 2(-1.72,-6.125) 3(0,-6.125) 4(1.72,-6.125) 5(3.44,-6.125)
  rect 10x9 all layers, no hole: 6(0,0)
  round 0.3 hole 0.3: hole(-4.2,-3.6) hole(-4.2,-2.4) hole(-4.2,-1.2) hole(-4.2,0) hole(-4.2,1.2) hole(-4.2,2.4) hole(-4.2,3.6) hole(-3,-3.6) hole(-3,-2.4) hole(-3,-1.2) hole(-3,0) hole(-3,1.2) hole(-3,2.4) hole(-3,3.6) hole(-1.8,-3.6) hole(-1.8,-2.4) hole(-1.8,-1.2) hole(-1.8,0) hole(-1.8,1.2) hole(-1.8,2.4) hole(-1.8,3.6) hole(-0.6,-3.6) hole(-0.6,-2.4) hole(-0.6,-1.2) hole(-0.6,0) hole(-0.6,1.2) hole(-0.6,2.4) hole(-0.6,3.6) hole(0.6,-3.6) hole(0.6,-2.4) hole(0.6,-1.2) hole(0.6,0) hole(0.6,1.2) hole(0.6,2.4) hole(0.6,3.6) hole(1.8,-3.6) hole(1.8,-2.4) hole(1.8,-1.2) hole(1.8,0) hole(1.8,1.2) hole(1.8,2.4) hole(1.8,3.6) hole(3,-3.6) hole(3,-2.4) hole(3,-1.2) hole(3,0) hole(3,1.2) hole(3,2.4) hole(3,3.6) hole(4.2,-3.6) hole(4.2,-2.4) hole(4.2,-1.2) hole(4.2,0) hole(4.2,1.2) hole(4.2,2.4) hole(4.2,3.6)
  body extent -4.75,-4.44 4.7,4.45, height 1.9
LFPAK-SO8 [mm] "TO, 5-Pads, Body 5.15x5.86mm (max), IPC Low Density"
  rect 1.15x0.7 smd: 1(-2.7,1.905) 2(-2.7,0.635) 3(-2.7,-0.635) 4(-2.7,-1.905)
  rect 4.6x4.7 smd: mb(1.3,0)
  silkscreen extent -2.77,2.66 -2.52,2.9, body extent -2.95,-2.5 3.05,2.5, height 1.25
"MSOP10 (RM-10)" [mm] "AD5314WARMZ-REEL7"
  oval 0.85x0.25 smd: 1(-2.225,1) 2(-2.225,0.5) 3(-2.225,0) 4(-2.225,-0.5) 5(-2.225,-1) 6(2.225,-1) 7(2.225,-0.5) 8(2.225,0) 9(2.225,0.5) 10(2.225,1)
  silkscreen extent -2.35,-1.55 1.15,1.8, body extent -1.55,-1.55 1.55,1.55, height 1.1
MSOP-8 [mm] "MSOP, 8-Leads, Body 3.00x3.00mmPitch 0.65mm, IPC MSOP65P490X110-8N, Medium Density, LTC2053, AD8495, LT6100HMS8PBF"
  rect 0.889x0.42 smd: 1(-2.105,0.975) 2(-2.105,0.325) 3(-2.105,-0.325) 4(-2.105,-0.975) 5(2.106,-0.975) 6(2.106,-0.325) 7(2.106,0.325) 8(2.106,0.975)
  silkscreen extent -2.23,-1.55 1.15,1.86, body extent -1.55,-1.55 1.55,1.55, height 1.1
"PTC Fuse 2920/07351" [mm] "Chip PTC Fuse, 2-Leads, Body 7.36x5.12mm, IPC Medium Density"
  rect 3.5x5.45 smd: 1(-2.625,0) 2(2.625,0)
  silkscreen extent -0.5,-2.62 0.5,2.62, body extent -3.99,-2.72 3.99,2.72, height 1.25
"RES 0402/1005" [mm] "Chip Resistor, 2-Leads, Body 1.0x0.5mm, IPC Medium Density"
  rect 0.75x0.6 smd: 1(-0.575,0) 2(0.575,0)
  silkscreen extent -1.14,-0.51 1.14,0.51, body extent -0.5,-0.25 0.5,0.25, height 0.35
"RES 0603/1608" [mm] "Chip Resistor, 2-Leads, Body 1.60x0.80mm, IPC Medium Density"
  rect 0.85x0.95 smd: 1(-0.65,0) 2(0.65,0)
  silkscreen extent -1.27,-0.7 1.27,0.7, body extent -0.8,-0.4 0.8,0.4, height 0.45
"RES 0805/2012" [mm] "Chip Resistor, 2-Leads, Body 2.00x1.25mm, IPC Medium Density"
  rect 1.15x1.35 smd: 1(-0.875,0) 2(0.875,0)
  silkscreen extent -1.7,-0.9 1.7,0.9, body extent -0.95,-0.62 1.05,0.63, height 0.6
"RES 2010/5025" [mm] "Current Sense Resistor, 2-Leads, Body 5.05x2.55mm, IPC Medium Density"
  rect 2.25x2.6 smd: 1(-1.775,0) 2(1.775,0)
  silkscreen extent -0.25,-1.2 0.25,1.2, body extent -2.55,-1.3 2.55,1.3, height 0.65
SO-20 [mm] "LT1161ISWPBF"
  rect 1.9x0.6 smd: 1(-4.75,5.715) 2(-4.75,4.445) 3(-4.75,3.175) 4(-4.75,1.905) 5(-4.75,0.635) 6(-4.75,-0.635) 7(-4.75,-1.905) 8(-4.75,-3.175) 9(-4.75,-4.445) 10(-4.75,-5.715) 11(4.75,-5.715) 12(4.75,-4.445) 13(4.75,-3.175) 14(4.75,-1.905) 15(4.75,-0.635) 16(4.75,0.635) 17(4.75,1.905) 18(4.75,3.175) 19(4.75,4.445) 20(4.75,5.715)
  silkscreen extent -4.87,-6.5 3.4,6.69, body extent -3.8,-6.5 3.8,6.5, height 2.65
SOD123F [mm] "SODFL, 2-Leads, Body 1.80x3.50mm, IPC Low Density"
  rect 1.35x1.45 smd: 1(-1.475,0) 2(1.475,0)
  silkscreen extent -0.38,-0.76 1.75,1.5, body extent -1.75,-0.95 1.75,0.95, height 1.15
SOIC-8 [mm] "SOIC, 8-Leads, Body 4.90x3.90mm, Pitch 1.27mm, IPC Medium Density"
  oval 1.45x0.6 smd: 1(-2.725,1.905) 2(-2.725,0.635) 3(-2.725,-0.635) 4(-2.725,-1.905) 5(2.725,-1.905) 6(2.725,-0.635) 7(2.725,0.635) 8(2.725,1.905)
  silkscreen extent -2.85,-2.5 1.6,2.88, body extent -3,-2.5 3,2.5, height 1.75
SOIC-16-NB [mm] "MMPQ3904, DG409DY-E3"
  oval 1.45x0.6 smd: 1(-2.725,4.445) 2(-2.725,3.175) 3(-2.725,1.905) 4(-2.725,0.635) 5(-2.725,-0.635) 6(-2.725,-1.905) 7(-2.725,-3.175) 8(-2.725,-4.445) 9(2.725,-4.445) 10(2.725,-3.175) 11(2.725,-1.905) 12(2.725,-0.635) 13(2.725,0.635) 14(2.725,1.905) 15(2.725,3.175) 16(2.725,4.445)
  silkscreen extent -2.85,-5 1.6,5.42, body extent -2,-5 2,5, height 1.75
SOT23-3 [mm] "SOT23, 3-Leads, Body 2.92x2.37mm, Pitch 0.95mm, IPC Medium Density, NUP2105L"
  rect 0.9x0.8 smd: 1(-1,0.95) 2(-1,-0.95) 3(1,0)
  silkscreen extent -1.12,-1.5 0.7,2.02, body extent -0.7,-1.52 0.7,1.52, height 1.11
SOT23-5 [mm] "SOT23, 5-Leads, Body 2.90x2.80mm, Pitch 0.95mm, IPC Medium Density, LP5907-3.3"
  rect 1x0.6 smd: 1(-1.375,0.95) 2(-1.375,0) 3(-1.375,-0.95) 4(1.375,-0.95) 5(1.375,0.95)
  silkscreen extent -1.5,-1.55 0.5,1.92, body extent -0.88,-1.52 0.87,1.53, height 1.45
"SOT-23 (TO-236)" [mm]
  rect 0.9x0.8 smd: 1(-1,0.95) 2(-1,-0.95) 3(1,0)
  silkscreen extent -1.12,-1.46 0.65,2.03, body extent -0.65,-1.46 0.65,1.46, height 1.11
SSOP-28 [mm] "SOP68P780X200-28N ,SOP, 28-Leads, Body 10.20x5.30mm, Pitch 0.68mm, IPC Medium Density, FT232RL"
  oval 1.65x0.5 smd: 1(-3.625,4.394) 2(-3.625,3.718) 3(-3.625,3.042) 4(-3.625,2.366) 5(-3.625,1.69) 6(-3.625,1.014) 7(-3.625,0.338) 8(-3.625,-0.338) 9(-3.625,-1.014) 10(-3.625,-1.69) 11(-3.625,-2.366) 12(-3.625,-3.042) 13(-3.625,-3.718) 14(-3.625,-4.394) 15(3.625,-4.394) 16(3.625,-3.718) 17(3.625,-3.042) 18(3.625,-2.366) 19(3.625,-1.69) 20(3.625,-1.014) 21(3.625,-0.338) 22(3.625,0.338) 23(3.625,1.014) 24(3.625,1.69) 25(3.625,2.366) 26(3.625,3.042) 27(3.625,3.718) 28(3.625,4.394)
  silkscreen extent -3.75,-5.25 2.4,5.32, body extent -2.8,-5.25 2.8,5.25, height 2
"SUPERSEAL 60POS 90Deg" [mm]
  round 2.2 hole 1.3: A1(7.25,14.5) A2(10.25,14.5) A3(13.25,14.5) A4(16.25,14.5) A5(19.25,14.5) A6(22.25,14.5) A7(25.25,14.5) A8(28.25,14.5) A9(31.25,14.5) A10(8.75,12) A11(11.75,12) A12(14.75,12) A13(17.75,12) A14(20.75,12) A15(23.75,12) A16(26.75,12) A17(29.75,12) A18(8.75,9) A19(11.75,9) A20(14.75,9) A21(17.75,9) A22(20.75,9) A23(23.75,9) A24(26.75,9) A25(29.75,9) A26(7.25,6.5) A27(10.25,6.5) A28(13.25,6.5) A29(16.25,6.5) A30(19.25,6.5) A31(22.25,6.5) A32(25.25,6.5) A33(28.25,6.5) A34(31.25,6.5) B1(45.75,14.5) B2(48.75,14.5) B3(51.75,14.5) B4(54.75,14.5) B5(57.75,14.5) B6(60.75,14.5) B7(63.75,14.5) B8(47.25,12) B9(50.25,12) B10(53.25,12) B11(56.25,12) B12(59.25,12) B13(62.25,12) B14(47.25,9) B15(50.25,9) B16(53.25,9) B17(56.25,9) B18(59.25,9) B19(62.25,9) B20(45.75,6.5) B21(48.75,6.5) B22(51.75,6.5) B23(54.75,6.5) B24(57.75,6.5) B25(60.75,6.5) B26(63.75,6.5)
  round 3.3 hole 3.3: CH(38.5,0) LH(0,0) RH(71,0)
  silkscreen extent -3.5,-3.5 74.5,17, body extent -3.5,-19.5 74.5,17, height 28.15
TECO-1981568-5_V [mm] "SMD, 5-Leads, Body 8x5.9mm, Pitch 0.65mm"
  rect 0.4x1.35 smd: 1(-1.3,0) 2(-0.65,0) 3(0,0) 4(0.65,0) 5(1.3,0)
  rect 1.6x1.4 smd: 6(-3.2,-0.225) 7(3.2,-0.225)
  rect 1.45x1.3 smd: 8(-3.425,-2.675) 9(3.425,-2.675)
  rect 1.9x1.9 smd: 10(-1.2,-2.675) 11(1.2,-2.675)
  silkscreen extent -4,-5.62 4,1.12, body extent -4,-5.63 4,0.28, height 3
TO-277 [mm] "DFN, 3-Leads, Body 4.44x5.91mm, Pitch 3.68mm, IPC Medium Density, FSV20100V"
  rect 1.3x1.45 smd: 1(-2.794,1.016) 2(-2.794,-1.016)
  rect 4.9x4.15 smd: 3(0.913,0)
  silkscreen extent -3.12,2.67 -3.03,2.76, body extent -3.3,-2.31 3.56,2.32, height 1.2
TQFP64 [mm] "TSQFP, 64-Leads, Body 10.00x10.00mm, Pitch 0.50mm, IPC Medium Density, MKE18F512VLH16"
  rect 1.35x0.3 smd: 1(-5.75,3.75) 2(-5.75,3.25) 3(-5.75,2.75) 4(-5.75,2.25) 5(-5.75,1.75) 6(-5.75,1.25) 7(-5.75,0.75) 8(-5.75,0.25) 9(-5.75,-0.25) 10(-5.75,-0.75) 11(-5.75,-1.25) 12(-5.75,-1.75) 13(-5.75,-2.25) 14(-5.75,-2.75) 15(-5.75,-3.25) 16(-5.75,-3.75) 33(5.75,-3.75) 34(5.75,-3.25) 35(5.75,-2.75) 36(5.75,-2.25) 37(5.75,-1.75) 38(5.75,-1.25) 39(5.75,-0.75) 40(5.75,-0.25) 41(5.75,0.25) 42(5.75,0.75) 43(5.75,1.25) 44(5.75,1.75) 45(5.75,2.25) 46(5.75,2.75) 47(5.75,3.25) 48(5.75,3.75)
  rect 0.3x1.35 smd: 17(-3.75,-5.75) 18(-3.25,-5.75) 19(-2.75,-5.75) 20(-2.25,-5.75) 21(-1.75,-5.75) 22(-1.25,-5.75) 23(-0.75,-5.75) 24(-0.25,-5.75) 25(0.25,-5.75) 26(0.75,-5.75) 27(1.25,-5.75) 28(1.75,-5.75) 29(2.25,-5.75) 30(2.75,-5.75) 31(3.25,-5.75) 32(3.75,-5.75) 49(3.75,5.75) 50(3.25,5.75) 51(2.75,5.75) 52(2.25,5.75) 53(1.75,5.75) 54(1.25,5.75) 55(0.75,5.75) 56(0.25,5.75) 57(-0.25,5.75) 58(-0.75,5.75) 59(-1.25,5.75) 60(-1.75,5.75) 61(-2.25,5.75) 62(-2.75,5.75) 63(-3.25,5.75) 64(-3.75,5.75)
  silkscreen extent -5.87,-4.68 4.67,4.67, body extent -5,-5 5,5, height 1.6
XG8T-0231 [mm] "3 pin header"
  round 1.4 hole 0.8: 1(0,0) 2(2.54,0)